# Altium PCB pcb.PcbDoc
Units mm, origin at the board's own origin, x right, y up, seen from the top; angles counter-clockwise.
Board outline 49 x 70 mm, 2 copper layers (Top Layer, Bottom Layer), stack 1.671 mm thick; 32 components, 20 nets, 116 pads, 28 vias.
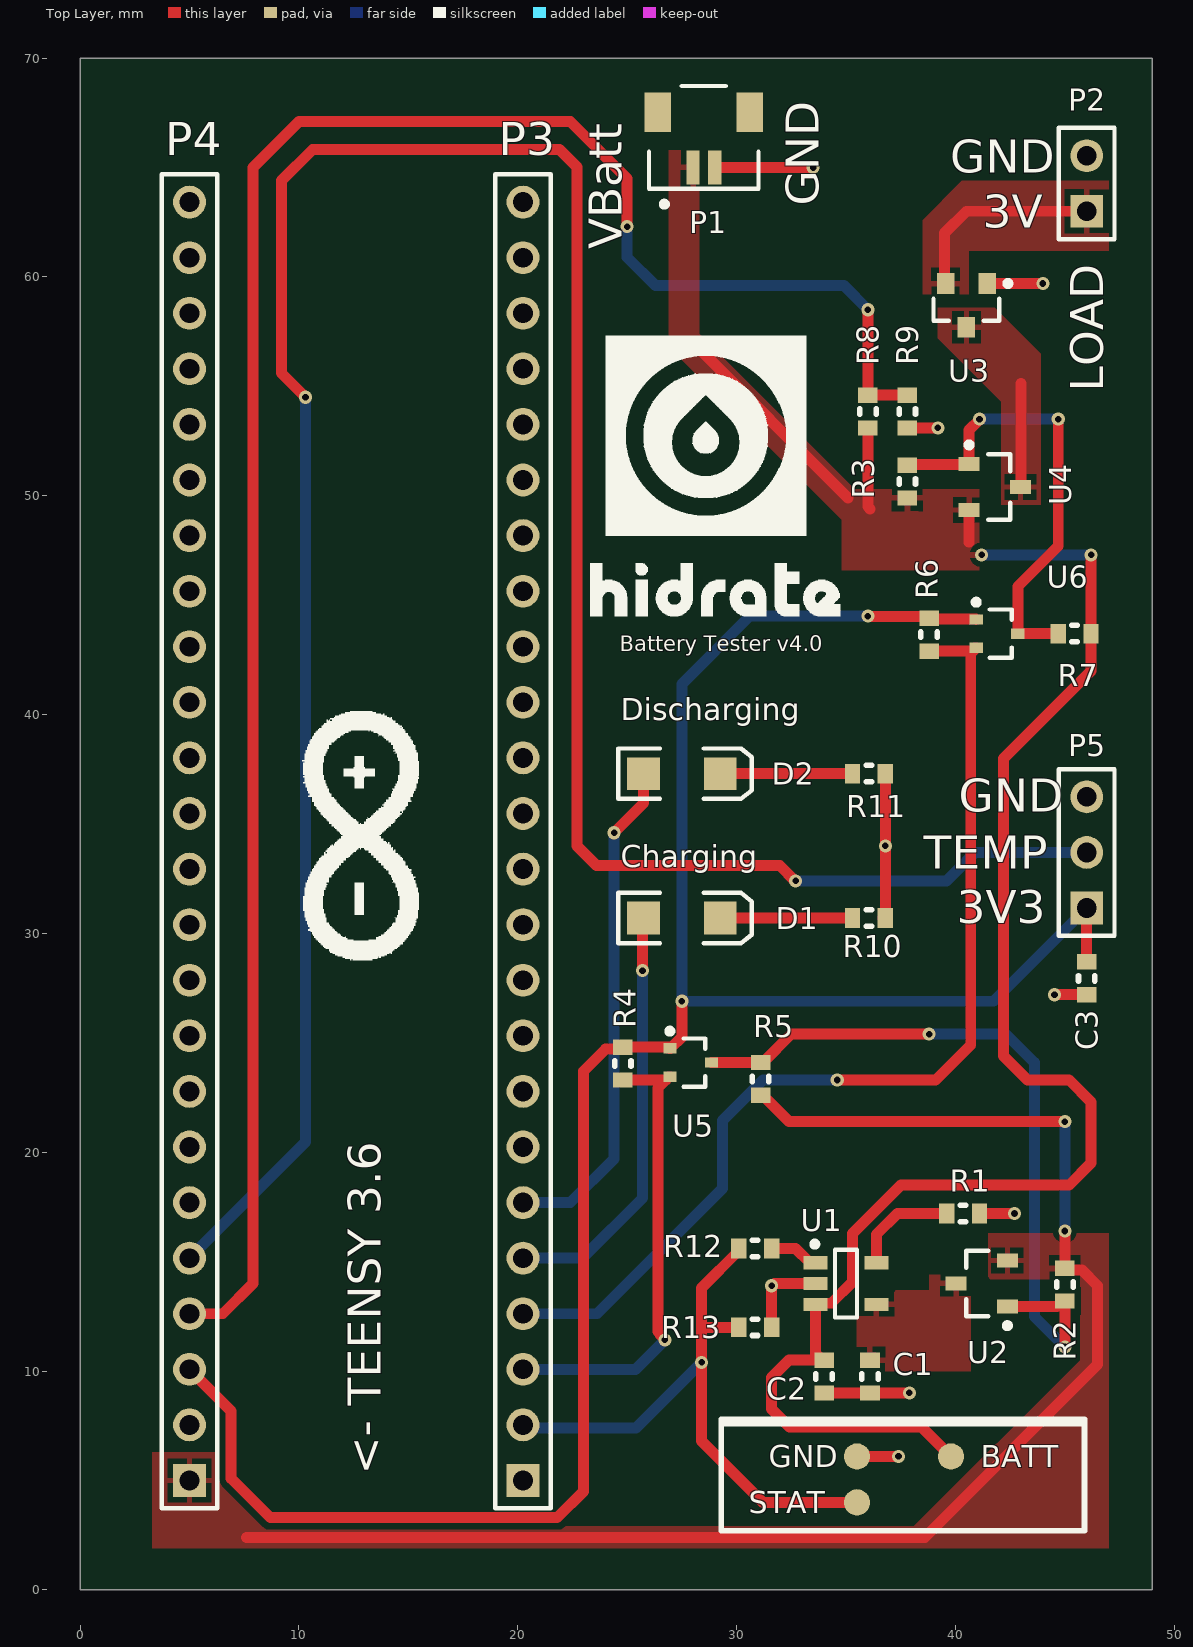
[diagram p0: Top Layer view]
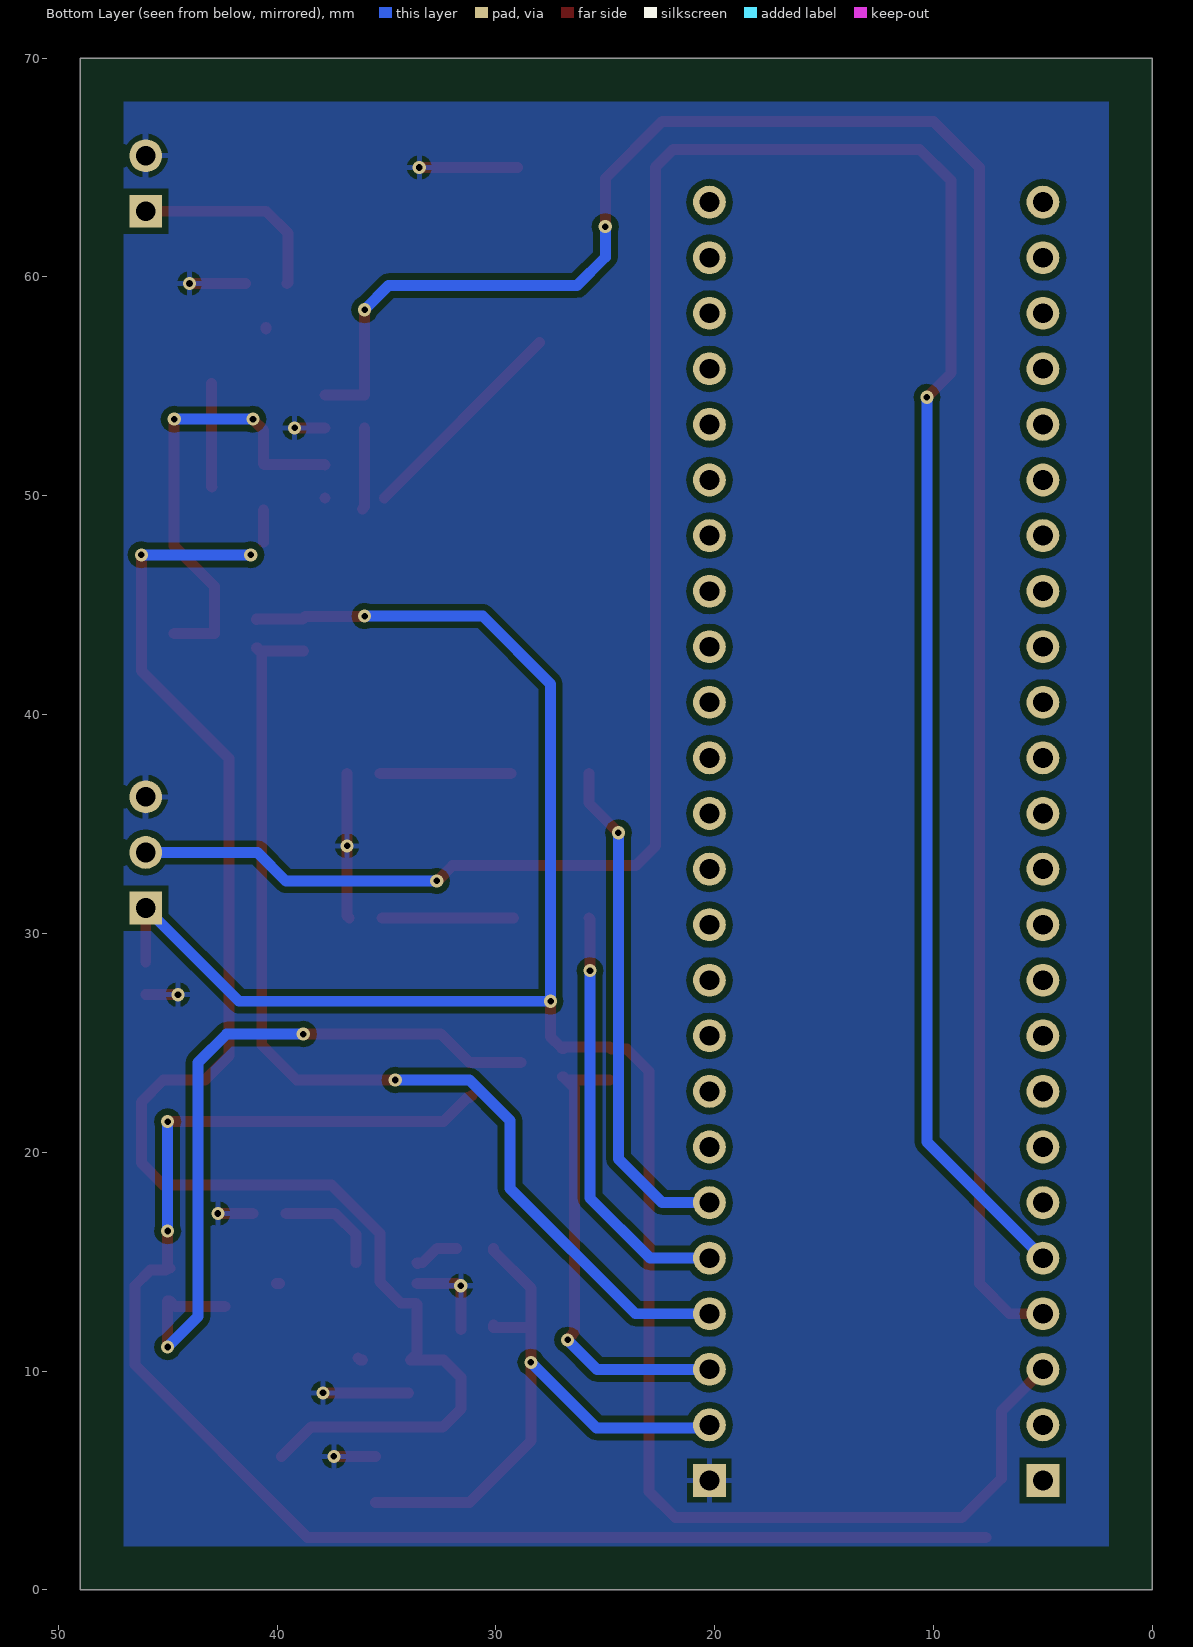
[diagram p1: Bottom Layer view, seen from below]

## Layer stack, top to bottom
Top Solder: solder mask 0.0102, Solder Resist, Dk 3.5
Top Layer: signal copper 0.0356
Dielectric 1: dielectric 1.6, FR-4, Dk 4.8
Bottom Layer: signal copper 0.0356
Bottom Solder: solder mask 0.0102, Solder Resist, Dk 3.5

## Board outline
0,0 49,0 49,70 0,70

## Design rules (kind name [scope] priority, off if disabled: settings)
Clearance [All] p1: gap=0.3 ignorepadtopadclearanceinfootprint=FALSE
PolygonConnect [All] p1: connectstyle=Relief reliefconductorwidth=0.254 reliefentries=4 polygonreliefangle="90 Angle" airgapwidth=0.254
RoutingVias [All] p1: holewidth=0.3 width=0.6 viastyle="Through Hole" minholewidth=0.3 minwidth=0.6 maxholewidth=0.3 maxwidth=0.6
SolderMaskExpansion [All] p1: expansion=0.102 istentingtop=FALSE
Width [All] p1: maxlimit=1 minlimit=0.3 preferedwidth=0.5
30 further rules are at their usual default settings.

## Classes and differential pairs
component class schem1: C3 D1 D2 P5 R9 R10 R11 R12 R13 STAT
component class schem0: BATT C1 C2 GND P1 P2 P3 P4 R1 R2 R3 R4 R5 R6 R7 U1 U2 U3 U4 U5 U6

## Components (designator, comment, footprint, x,y, rotation, side; value= is the part's Value field where it differs from the comment)
BATT "Vbatt_pos" "test pad" 39.8,6.1 r90 top (schematic designator Vbatt1)
C1 "CAP" "Cap 0603 (1608 metric)" 36.1,9 r90 top value=4.7uF
C2 "CAP" "Cap 0603 (1608 metric)" 34,9 r90 top value=4.7uF
C3 "CAP" "Cap 0603 (1608 metric)" 46,27.2 r90 top value=4.7uF
D1 "LED2" 3.2X1.6X1.1 27.5,30.7 r0 top
D2 "LED2" 3.2X1.6X1.1 27.5,37.3 r0 top
GND "GND" "test pad" 35.5,6.1 r90 top (schematic designator GND1)
P1 "JST-2" "JST-2 SMT" 28.5,64.225 r0 top
P2 "Header 2" HDR1X2 46,63 r90 top
P3 "Header 24" HDR1X24 20.24,5 r90 top
P4 "Header 24" HDR1X24 5,5 r90 top
P5 "Header 3" HDR1X3 46,31.16 r90 top
R1 "RES" "Res 0603 (1608 metric)" 39.6,17.2 r0 top value=5K
R2 "RES" "Res 0603 (1608 metric)" 45,14.7 r270 top value=100K
R3 "RES" "Res 0603 (1608 metric)" 37.8,51.4 r270 top value=100K
R4 "RES" "Res 0603 (1608 metric)" 24.8,24.8 r270 top value=10K
R5 "RES" "Res 0603 (1608 metric)" 31.1,22.6 r90 top value=10K
R6 "RES" "Res 0603 (1608 metric)" 38.8,44.4 r270 top value=10K
R7 "RES" "Res 0603 (1608 metric)" 46.2,43.7 r180 top value=10K
R8 "RES" "Res 0603 (1608 metric)" 36,53.1 r90 top value=10K
R9 "RES" "Res 0603 (1608 metric)" 37.8,53.1 r90 top value=10K
R10 "RES" "Res 0603 (1608 metric)" 36.8,30.7 r180 top value=150
R11 "RES" "Res 0603 (1608 metric)" 36.8,37.3 r180 top value=150
R12 "RES" "Res 0603 (1608 metric)" 31.6,15.6 r180 top value=10K
R13 "RES" "Res 0603 (1608 metric)" 30.1,12 r0 top value=10K
STAT "charge_stat" "test pad" 35.5,4 r90 top (schematic designator stat1)
U1 "MCP73831" SOT23127P600-8N 35,14 r0 top
U2 "DMG2305UX" SOT105P240X110-3N 41.2,14 r180 top
U3 "AP2120N" AP2120 40.5,58.7 r270 top
U4 "DMG2305UX" SOT105P240X110-3N 41.8,50.4 r0 top
U5 "DMN63D8LW" DMN63D8LW 27.9,24.1 r0 top
U6 "DMN63D8LW" DMN63D8LW 41.9,43.7 r0 top

## Footprints (in the part's own frame and the unit in brackets; to place one, negate y for a bottom-side part, rotate by r counter-clockwise, add the part's x,y. Pads: shape width x height; smd on the part's side, far side on the other; paste and mask are expansions set on the pad)
3.2X1.6X1.1 [mm] "SMT LED; 2 Flat Leads"
  rect 1.5x1.5 smd: 1(-1.75,0) 2(1.75,0)
  silkscreen extent -2.9,-1.15 3.2,1.15
AP2120 [mm] "SOT-23"
  rect 0.95x0.8 smd: 1(-1,0.95) 2(-1,-0.95) 3(1,0)
  silkscreen extent -1.12,-1.5 0.7,2.03, body extent -0.7,-1.5 0.7,1.5, height 1.05
"Cap 0603 (1608 metric)" [mm]
  rect 0.7x0.9 smd: 1(0,0) 2(1.5,0)
  silkscreen extent 0.63,-0.38 0.87,0.38, body extent -0.05,-0.4 1.55,0.4, height 0.55
DMN63D8LW [mm] "N-MOSFET SOT-323"
  rect 0.6x0.47 smd: 1(-0.95,0.65) 2(-0.95,-0.65) 3(0.95,0)
  silkscreen extent -1.07,-1.1 0.67,1.56, body extent -0.67,-1.1 0.67,1.1, height 1.1
HDR1X2 [mm] "Connector; Header; 2 Position"
  rect 1.5x1.5 hole 0.9: 1(0,0)
  round 1.5 hole 0.9: 2(2.54,0)
  silkscreen extent -1.27,-1.27 3.81,1.27
HDR1X3 [mm] "Connector; Header; 3 Position"
  rect 1.5x1.5 hole 0.9: 1(0,0)
  round 1.5 hole 0.9: 2(2.54,0) 3(5.08,0)
  silkscreen extent -1.27,-1.27 6.35,1.27
HDR1X24 [mm] "Connector; Header; 24 Position"
  rect 1.5x1.5 hole 0.9: 1(0,0)
  round 1.5 hole 0.9: 2(2.54,0) 3(5.08,0) 4(7.62,0) 5(10.16,0) 6(12.7,0) 7(15.24,0) 8(17.78,0) 9(20.32,0) 10(22.86,0) 11(25.4,0) 12(27.94,0) 13(30.48,0) 14(33.02,0) 15(35.56,0) 16(38.1,0) 17(40.64,0) 18(43.18,0) 19(45.72,0) 20(48.26,0) 21(50.8,0) 22(53.34,0) 23(55.88,0) 24(58.42,0)
  silkscreen extent -1.27,-1.27 59.69,1.27
"JST-2 SMT" [mm] "BM02B-SRSS-TB"
  rect 1.2x1.8 smd: 0(-2.1,3.3) 0(2.1,3.3)
  rect 0.6x1.55 smd: 1(-0.5,0.775) 2(0.5,0.775)
  silkscreen extent -2.5,-1.02 2.5,4.5, body extent -2,0.4 2,4, height 4.25
"Res 0603 (1608 metric)" [mm]
  rect 0.7x0.9 smd: 1(0,0) 2(1.5,0)
  silkscreen extent 0.63,-0.38 0.87,0.38, body extent -0.05,-0.4 1.55,0.4, height 0.55
SOT105P240X110-3N [mm] "SOT23, 3-Leads, Body 2.90x2.40mm, Pitch 1.05mm, IPC Medium Density"
  rect 0.95x0.65 smd: 1(-1.175,1.05) 2(-1.175,-1.05) 3(1.175,0)
  silkscreen extent -1.3,-1.5 0.7,2.05, body extent -0.7,-1.5 0.7,1.5, height 1.1
SOT23127P600-8N [mm]
  rect 1.1x0.6 smd: 1(-1.4,0.95) 2(-1.4,0) 3(-1.4,-0.95) 4(1.4,-0.95) 5(1.4,0.95)
  silkscreen extent -1.55,-1.55 0.5,1.92, body extent -0.9,-1.55 0.9,1.55, height 1.45
"test pad" [mm] "test pad"
  round 1.2 smd paste-0.6: 1(0,0)

## Part data
BATT GND STAT: library part test_pad, "test pad"
D1 D2: "Typical RED, GREEN, YELLOW, AMBER GaAs LED", LatestRevisionDate=17-Jul-2002, LatestRevisionNote="Re-released for DXP Platform.", PackageDescription="SM LED; 2 Flat Leads", PackageReference=3.2X1.6X1.1, PackageVersion=Feb-2002, Published=8-Jun-2000, Publisher="Altium Limited"
P2: "Header, 2-Pin", LatestRevisionDate=17-Jul-2002, LatestRevisionNote="Re-released for DXP Platform.", Publisher="Altium Limited"
P3 P4: "Header, 24-Pin", LatestRevisionDate=17-Jul-2002, LatestRevisionNote="Re-released for DXP Platform.", Publisher="Altium Limited"
P5: "Header, 3-Pin", LatestRevisionDate=17-Jul-2002, LatestRevisionNote="Re-released for DXP Platform.", Publisher="Altium Limited"
U1: "Li-Charge Management Controllers"
U2 U4: "P-MOSFET"
U3: "3.0V regulator"
U5 U6: "N-MOSFET SOT-323", =NMOS

## Via types
v1: diameter 0.6, hole 0.3, Top Layer to Bottom Layer, 28 vias

## Nets (pads, with @x,y where several pads share a name; then routed paths per layer and width w, separated by ;. In a path a pad name is that pad's centre, name@x,y a point inside that pad or via, vN(x,y) a via of type N, cw(c..) or ccw(c..) an arc to the next point about the centre after c; other vN are vias at no path point)
GND: C1.1 C2.1 C3.1 GND.1 P1.2 P2.2 P3.1 P5.3 R1.2 R9.1 R10.1 R11.1 R13.2 U1.2 U3.1 | length 28
  Top Layer w0.5: P1.2 v1(33.5,65) ; R13.2@31.6,11.9 R13.2 31.601,12.001 31.601,13.863 31.583,13.881 v1(31.602,13.9) 31.629,13.9 31.729,14 U1.2 ; C2.1 C1.1 v1(37.9,9) ; GND.1 v1(37.4,6.1) ; R10.1@36.7,30.7 36.8,30.8 v1(36.8,34) R11.1 ; R9.1 v1(39.2,53.1) ; R1.2 v1(42.7,17.2) ; U3.1 v1(44,59.7) ; v1(44.527,27.2) C3.1
NetC1_2: C1.2 U1.4 U2.3 | length 0.4
  Top Layer w0.5: C1.2 36.2,10.5 C1.2@36.3,10.6 ; U2.3@39.875,14 U2.3
NetC2_2: BATT.1 C2.2 P1.1 R3.2 R7.1 R8.1 U1.3 U4.2 | length 84.9
  Top Layer w0.5: 28,57 35.1,49.9 ; R8.1 36,49.5 36.1,49.4 ; BATT.1 38.454,7.446 32.415,7.446 31.6,8.261 31.6,9.7 32.4,10.5 33.9,10.5 33.6,10.8 U1.3 33.65,13.1 34.328,13.1 35.3,14.072 35.3,16.281 37.519,18.5 45.2,18.5 46.2,19.5 46.2,22.3 45.2,23.3 43.3,23.3 42.2,24.4 42.2,38 46.2,42 R7.1 v1(46.2,47.3) ; 40.625,47.875 U4.2
  Bottom Layer w0.5: v1(41.2,47.3) v1(46.2,47.3)
NetC3_2: C3.2 P4.3 P5.1 R4.1 R6.1 U5.1 U6.1 | length 101.3
  Top Layer w0.5: P4.3 6.9,8.18 6.9,5.1 8.7,3.3 21.8,3.3 23,4.5 23,23.7 24.02,24.72 24.72,24.72 R4.1 26.865,24.8 26.915,24.75 U5.1 26.985,24.75 27.5,25.265 v1(27.5,26.9) ; v1(36,44.5) 36.019,44.481 38.719,44.481 R6.1 38.835,44.365 40.935,44.365 U6.1 ; C3.2 P5.1
  Bottom Layer w0.5: P4.3@4.88,10.2 P4.3 ; v1(36,44.5) 30.6,44.5 27.5,41.4 v1(27.5,26.9) 41.74,26.9 P5.1
NetD1_1: D1.1 P3.5 | length 19.4
  Top Layer w0.5: v1(25.7,28.3) 25.7,30.65 D1.1
  Bottom Layer w0.5: P3.5 22.96,15.16 25.7,17.9 v1(25.7,28.3)
NetD1_2: D1.2 R10.2 | length 6
  Top Layer w0.5: D1.2@29.2,30.7 R10.2@35.2,30.7
NetD2_1: D2.1 P3.6 | length 23.1
  Top Layer w0.5: v1(24.4,34.6) 25.75,35.95 D2.1
  Bottom Layer w0.5: P3.6 22.4,17.7 24.4,19.7 v1(24.4,34.6)
NetD2_2: D2.2 R11.2 | length 6
  Top Layer w0.5: D2.2@29.3,37.3 R11.2
NetP2_1: P2.1 U3.2 | length 9.2
  Top Layer w0.5: U3.2 39.5,59.75 39.5,62 40.5,63 P2.1
NetP3_2: P3.2 R12.2 R13.1 STAT.1 | length 29.1
  Top Layer w0.5: R13.1@30.1,12.1 R13.1 28.5,12 28.4,12.1 ; R12.2 30.1,15.5 28.4,13.8 28.4,12.1 ; STAT.1 31.2,4 28.4,6.8 v1(28.4,10.4) 28.4,12.1
  Bottom Layer w0.5: P3.2 20.38,7.4 25.4,7.4 v1(28.4,10.4)
NetP3_3: P3.3 R4.2 U5.2 | length 21.4
  Top Layer w0.5: R4.2 U5.2@26.765,23.3 ; v1(26.725,11.425) 26.725,11.452 26.5,11.677 26.5,11.7 26.4,11.8 26.4,22.935 U5.2@26.765,23.3 ; U5.2 26.915,23.45 U5.2@26.765,23.3
  Bottom Layer w0.5: P3.3 25.38,10.08 v1(26.725,11.425)
NetP3_4: P3.4 R6.2 U6.2 | length 47.6
  Top Layer w0.5: v1(34.6,23.3) 39.1,23.3 40.7,24.9 40.7,42.8 U6.2@40.8,42.9 ; R6.2 U6.2@40.8,42.9 ; U6.2 40.915,43.05 40.9,43.035 40.9,43 U6.2@40.8,42.9
  Bottom Layer w0.5: P3.4 23.62,12.62 29.35,18.35 29.35,21.45 31.2,23.3 v1(34.6,23.3)
NetP4_1: P4.1 R2.1 R5.1 U2.2 | length 68.8
  Top Layer w0.5: 7.6,2.4 38.6,2.4 46.5,10.3 46.5,13.9 45.78,14.62 45.08,14.62 R2.1 ; R5.1 31.2,22.5 31.3,22.5 32.4,21.4 v1(45,21.4) ; R2.1@44.9,14.7 R2.1 ; v1(45,16.4) R2.1
  Bottom Layer w0.5: v1(45,16.4) v1(45,21.4)
NetP4_4: P4.4 R8.2 R9.2 | length 94.8
  Top Layer w0.5: P4.4 6.52,12.62 7.9,14 7.9,65 10,67.1 22.4,67.1 25,64.5 v1(25,62.3) ; v1(36,58.5) R8.2 R9.2
  Bottom Layer w0.5: v1(25,62.3) 25,60.9 26.3,59.6 34.9,59.6 v1(36,58.5)
NetP4_5: P4.5 P5.2 | length 121.8
  Top Layer w0.5: v1(10.3,54.5) 9.2,55.6 9.2,64.4 10.632,65.832 21.9,65.832 22.7,65.032 22.7,34 23.6,33.1 31.973,33.1 32.673,32.4 v1(32.7,32.4)
  Bottom Layer w0.5: P4.5 10.3,20.46 v1(10.3,54.5) ; v1(32.7,32.4) 39.6,32.4 40.9,33.7 P5.2
NetR1_1: R1.1 U1.5 | length 5.4
  Top Layer w0.5: U1.5 36.4,16.25 37.35,17.2 38,17.2 ; 37.5,17.2 R1.1
NetR2_2: R2.2 R5.2 U2.1 U5.3 | length 34.2
  Top Layer w0.5: U5.3 R5.2 31.2,24.1 32.5,25.4 v1(38.8,25.4) ; U2.1 44.65,12.95 44.9,13.2 R2.2 v1(45,11.1)
  Bottom Layer w0.5: v1(38.8,25.4) 42.3,25.4 43.605,24.095 43.605,12.495 v1(45,11.1)
NetR3_1: R3.1 R7.2 U4.1 U6.3 | length 21.1
  Top Layer w0.5: R3.1 37.825,51.425 40.6,51.425 U4.1 40.625,52.998 41.1,53.473 v1(41.1,53.5) ; R7.2 U6.3 42.85,45.85 44.7,47.7 v1(44.7,53.5)
  Bottom Layer w0.5: v1(41.1,53.5) v1(44.7,53.5)
NetR12_1: R12.1 U1.1 | length 2.1
  Top Layer w0.5: R12.1@31.8,15.6 32.7,15.6 33.35,14.95 U1.1 U1.1@33.575,14.925
NetU3_3: U3.3 U4.3 | length 4.8
  Top Layer w0.5: U3.3@40.5,57.625 U3.3 ; U4.3 43,50.425 43,55.125
pads on no net: P1.0 P3.7 P3.8 P3.9 P3.10 P3.11 P3.12 P3.13 P3.14 P3.15 P3.16 P3.17 P3.18 P3.19 P3.20 P3.21 P3.22 P3.23 P3.24 P4.2 P4.6 P4.7 P4.8 P4.9 P4.10 P4.11 P4.12 P4.13 P4.14 P4.15 P4.16 P4.17 P4.18 P4.19 P4.20 P4.21 P4.22 P4.23 P4.24

## Polygon pours and split planes (outlines as drawn)
GND on Bottom Layer "GND_L02_P002" (solid, pour order 2): 2,68 47,68 47,2 2,2
GND on Bottom Layer "GND_L02_P001" (solid, pour order 1): 1.5,68.5
GND on Bottom Layer "GND_L02_P000" (solid, pour order 0): 0,70
NetC2_2 on Top Layer "NETC2_2_L01_P005" (solid, pour order 5): 28.3,65.8 26.9,65.8 26.9,56.8 34.8,48.9 38.3,48.9 38.3,50.3 35.3,50.3 35.3,50.4 28.3,57.4
NetP2_1 on Top Layer "NETP2_1_L01_P009" (solid, pour order 9): 47,61.2 40.6,61.2 40.6,59.2 38.5,59.2 38.5,62.6 40.3,64.4 47,64.4
NetU3_3 on Top Layer "NETU3_3_L01_P007" (solid, pour order 7): 42.1,49.6 43.9,49.6 43.9,56.5 41.8,58.6 39.2,58.6 39.2,57.2 42.1,54.3
NetC2_2 on Top Layer "NETC2_2_L01_P006" (solid, pour order 6): 41.1,50.3 41.1,46.6 34.8,46.6 34.8,50.3
NetC1_2 on Top Layer "NETC1_2_L01_P004" (solid, pour order 4): 40.7,14.4 40.7,10 35.5,10 35.5,13.2 36,13.7 38.8,13.7 38.8,14.4
NetP4_1 on Top Layer "NETP4_1_L01_P003" (solid, pour order 3): 6.6,6.3 6.6,4.9 8.6,2.9 38.1,2.9 45.7,10.5 45.7,14.2 41.6,14.2 41.5,14.3 41.5,16.3 47,16.3 47,1.9 3.3,1.9 3.3,6.3

## Silkscreen, mask and mechanical layers (free items; w line width, h text height)
Top Overlay:
  drawing of 24 lines, arcs and shapes, not listed
  text "GND" at 39.754,64.754 h1.52
  text "GND" at 33.746,63.254 h1.52 r90
  text "3V" at 41.254,62.254 h1.52
  text "VBatt" at 24.746,61.254 h1.52 r90
  text "LOAD" at 46.746,54.754 h1.52 r90
  text "Battery Tester v4.0" at 24.65,42.883 h0.7
  text "Discharging" at 24.7,39.733 h1
  text "GND" at 40.154,35.554 h1.52
  text "Charging" at 24.7,33.033 h1
  text "TEMP" at 38.554,32.954 h1.52
  text "3V3" at 40.054,30.454 h1.52
  text "<- TEENSY 3.6" at 13.746,5.254 h1.52 r90
Mechanical 1:
  lines w0.254: 0,0 0,70 49,70 49,56 49,0 0,0